# EAGLE board 808_bass_drumv2 (EAGLE 9.0.0)
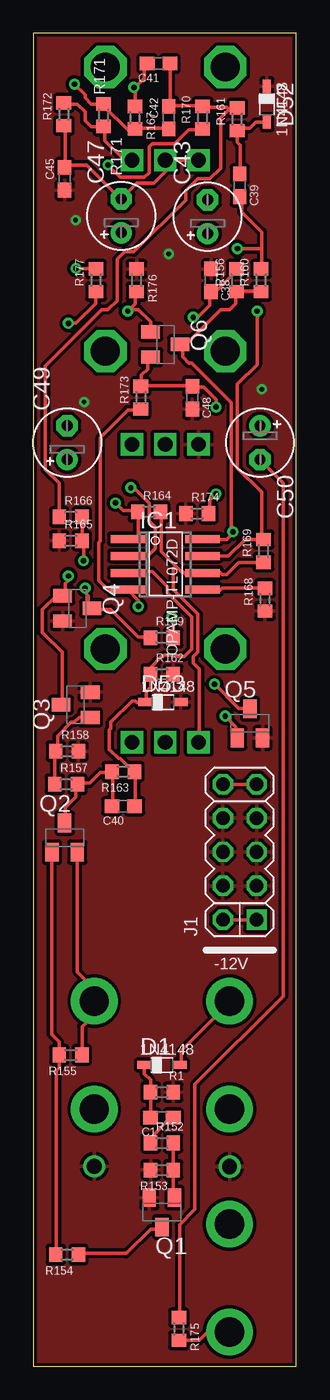
[diagram p0: board, top side]
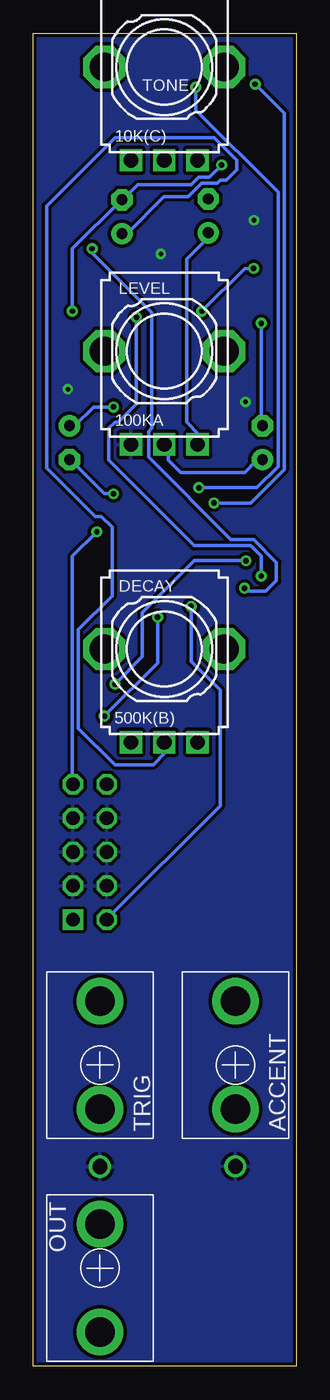
[diagram p1: board, bottom side, seen from below]

Size 19.74 x 100.07 mm. Coordinates in mm from the lower left corner, seen from the top.
Outline: 0,0 19.74,0 19.74,100.07 0,100.07 0,0
Copper layers (1*16): Top 0.035mm / dielectric 1.5mm / Bottom 0.035mm
Design rules "default *": minimum track width 10mil, minimum drill 16mil, track to track 7mil, track to pad 1mil, pad to pad 20mil, via to via 20mil, smd to smd 8mil, copper to edge 10mil, drill to drill 12mil, minimum pad ring 10mil, minimum via ring 8mil, stop-mask expansion 4mil, vias tented up to drill 17mil, thermal gap 10mil
Net classes: 0 default: width 0.203 mm, drill 0.406 mm, clearance 0.203 mm; 1 GND: width 0.254 mm, drill 0.406 mm, clearance 0.254 mm; 2 Power: width 0.254 mm, drill 0.406 mm, clearance 0.254 mm; 3 special: width 0.305 mm, drill 0.406 mm, clearance 0.254 mm; 4 15v: width 0.254 mm, drill 1.016 mm, clearance 0.254 mm

## Footprints (pad centres in the part's own frame; a part is rotated, then mirrored left to right if it is on the bottom)
KOBICONN_PJM301DM_JACK = drill 2.2 pad 3.5: P$1 0,4.8; P$2 0,-3.3 | drill 1.1: P$3 0,-7.6
C0603 = smd 1.1 x 1: 1 -0.85,0; 2 0.85,0
E2,5-5 = drill 0.813 pad 1.6: + -1.27,0 | drill 0.813 pad 1.6 octagon: - 1.27,0
SOD323W_INFINEON = smd 1 x 0.6: A 1.35,0; C -1.35,0
9MM_PLS = drill 1.1 pad 1.676 square: 1 -2.5,-7; 2 0,-7; 3 2.5,-7 | drill 2.159 pad 3.175 octagon: M1 4.5,0; M2 -4.5,0
SO08 = smd 0.6 x 2.6: 1 -1.905,-2.8; 2 -0.635,-2.8; 3 0.635,-2.8; 4 1.905,-2.8; 5 1.905,2.8; 6 0.635,2.8; 7 -0.635,2.8; 8 -1.905,2.8
2X05_EUROPWR_OPEN = drill 1.016 square: 1 -5.08,-1.27 | drill 1.016 octagon: 2 -5.08,1.27; 3 -2.54,-1.27; 4 -2.54,1.27; 5 0,-1.27; 6 0,1.27; 7 2.54,-1.27; 8 2.54,1.27; 9 5.08,-1.27; 10 5.08,1.27
SOT23-BEC = smd 1 x 1.4: B -0.95,-1.1; C 0,1.1; E 0.95,-1.1
R0603 = smd 1 x 1.1: 1 -0.85,0; 2 0.85,0

## Placement (x,y rotation side)
ACCENT  THONKICONN_WQP-PJ301M-12_JACK  [KOBICONN_PJM301DM_JACK]  4.57,22.61 0 bottom
C1  0.1  [C0603]  9.65,18.67 0 top
C38  100n  [C0603]  13.34,81.52 90 top
C39  33n  [C0603]  15.49,88.65 90 top
C40  15n  [C0603]  6.75,42.04 0 top
C41  15n  [C0603]  9.4,97.79 0 top
C42  15n  [C0603]  10.16,93.73 270 top
C43  33/6.3  [E2,5-5]  13.08,86.3 90 top
C45  100n  [C0603]  2.35,89.14 270 top
C47  .47/50  [E2,5-5]  6.6,86.36 90 top
C48  220p  [C0603]  11.94,72.71 90 top
C49  .47/50  [E2,5-5]  2.54,69.33 90 top
C50  1/50  [E2,5-5]  17.02,69.33 270 top
D1  1N4148  [SOD323W_INFINEON]  9.65,22.61 0 top
D52  1N4148  [SOD323W_INFINEON]  17.53,94.74 270 top
D53  1N4148  [SOD323W_INFINEON]  9.72,49.85 0 top
DECAY  500K(B)  [9MM_PLS]  9.91,53.85 0 bottom
IC1  OPAMP-TL072D  [SO08]  9.91,60.2 270 top
J1  HEADER-EUROPWR_2X05-OPEN  [2X05_EUROPWR_OPEN]  15.49,38.61 90 top
LEVEL  100KA  [9MM_PLS]  9.91,76.2 0 bottom
OUT  THONKICONN_WQP-PJ301M-12_JACK  [KOBICONN_PJM301DM_JACK]  14.73,7.37 180 bottom
Q1  bc546  [SOT23-BEC]  9.65,11.56 180 top
Q2  bc556  [SOT23-BEC]  2.35,39.69 0 top
Q3  bc546  [SOT23-BEC]  3.17,49.66 90 top
Q4  bc546  [SOT23-BEC]  3.3,56.9 270 top
Q5  bc546  [SOT23-BEC]  16.26,48.26 0 top
Q6  bc546  [SOT23-BEC]  9.91,76.71 270 top
R1  100K  [R0603]  9.65,20.57 180 top
R152  22K  [R0603]  9.65,16.76 180 top
R153  10K  [R0603]  9.65,14.73 0 top
R154  10K  [R0603]  2.54,8.38 0 top
R155  4K7  [R0603]  2.79,23.37 0 top
R156  1M  [R0603]  15.24,81.52 270 top
R157  8K2  [R0603]  2.46,43.69 180 top
R158  2K7  [R0603]  2.54,46.16 180 top
R159  100K  [R0603]  9.64,54.69 180 top
R160  22K  [R0603]  17.08,81.52 270 top
R161  1M  [R0603]  15.3,93.6 270 top
R162  4K7  [R0603]  9.64,51.94 180 top
R163  100K  [R0603]  6.75,44.64 0 top
R164  47K  [R0603]  8.69,64.14 180 top
R165  47K  [R0603]  2.79,61.98 180 top
R166  6K8  [R0603]  2.79,63.75 180 top
R167  1M  [R0603]  7.62,93.73 90 top
R168  22K  [R0603]  17.38,57.55 270 top
R169  47K  [R0603]  17.27,61.21 270 top
R170  470K  [R0603]  12.7,93.73 270 top
R171  220R  [R0603]  5.27,93.92 270 top
R172  10K  [R0603]  2.29,93.98 270 top
R173  6K8  [R0603]  8.06,72.71 270 top
R174  100K  [R0603]  12.3,64.01 180 top
R175  1K  [R0603]  10.92,2.79 90 top
R176  100K  [R0603]  7.75,81.52 90 top
R177  82K  [R0603]  4.7,81.52 270 top
TONE  10K(C)  [9MM_PLS]  9.91,97.54 0 bottom
TRIG  THONKICONN_WQP-PJ301M-12_JACK  [KOBICONN_PJM301DM_JACK]  14.73,22.61 0 bottom

## Library data of the parts
ACCENT C1 C38-C43 C45 C47-C50 D1 D52 D53 DECAY IC1 J1 LEVEL OUT Q1-Q6 R1 R152-R177 TONE TRIG = 0000-master

## Nets
+12V: IC1.8 J1.9 J1.10 Q6.C R156.2 R160.2
-12V: IC1.4 J1.1 J1.2 R173.2
C49: C49.- R177.2
GND [GND]: ACCENT.P$3 C38.2 C45.2 C48.1 D52.C D53.A J1.3 J1.4 J1.5 J1.6 J1.7 J1.8 LEVEL.1 OUT.P$3 Q1.E Q3.E Q4.E Q5.E R1.1 R153.1 R158.1 R162.1 R165.2 R168.2 R174.2 R176.2 TRIG.P$3
N$1: DECAY.1 IC1.6 R164.1 R169.2
N$2: IC1.5 R168.1
N$3: OUT.P$1 R175.1
N$4: D1.A TRIG.P$1
N$5: C1.1 D1.C R1.2
N$6: C1.2 R152.2
N$162: C38.1 Q3.C Q4.B R156.1
N$164: Q2.B R154.1 R155.1
N$168: Q5.C R165.1 R166.1
N$169: Q3.B R157.2 R158.2
N$188: Q1.C R154.2
N$190: C39.1 Q4.C R159.2 R160.1
N$191: C40.1 Q2.C R157.1 R163.1
N$192: C40.2 D53.C IC1.3 R162.2 R163.2
N$193: Q5.B R159.1
N$195: C41.2 C42.1 R161.1 R166.2 R170.1
N$196: C41.1 IC1.2 R167.2
N$197: C42.2 IC1.1 R164.2 R167.1 R171.1
N$198: C45.1 C47.- R172.2 TONE.1 TONE.2
N$199: R171.2 R172.1 TONE.3
N$202: C43.- IC1.7 R169.1 R170.2
N$203: Q6.B R176.1 R177.1
N$204: C48.2 C50.+ Q6.E R173.1
N$205: C50.- R174.1 R175.2
N$206: C47.+ LEVEL.3
N$207: C49.+ LEVEL.2
N$208: C43.+ DECAY.2
N$217: Q1.B R152.1 R153.2
N$242: C39.2 D52.A R161.2
TRIG: ACCENT.P$1 Q2.E R155.2

## Tracks (layer width: path | path; a pad name or v marks a point on that pad's centre or on a via)
+12V  (via drill 0.41)
  Top 0.254: J1.10 14.29,43.66 16.69,43.66 J1.9 | R160.2 17.03,80.7 15.32,80.7 R156.2 15.2,80.58 15.2,79.78 14.74,79.32 14.06,79.32 11.54,76.81 11.09,76.81 Q6.C 11.2,76.69 11.2,75.78 11.66,75.32 11.89,75.32 14.86,72.35 14.86,62.64 | 14.86,62.64 14.86,62.41 14.52,62.06 12.8,62.06 IC1.8 | v14.97,62.64 14.86,62.64
  Bottom 0.254: v14.97,62.64 16.8,60.81 16.8,43.78 J1.9
-12V  (via drill 0.41)
  Top 0.254: J1.2 14.29,33.49 16.69,33.49 J1.1 | 7.09,58.29 6.97,58.18 5.83,58.18 5.6,58.41 5.49,58.41 4.92,58.98 4.92,61.84 5.03,61.95 5.03,69.72 7.09,71.78 8,71.78 R173.2 | v7.89,57.04 7.89,57.49 7.09,58.29 | 7.09,58.29 IC1.4
  Bottom 0.254: v7.89,57.04 7.89,52.92 5.71,50.75 5.71,42.06 14.17,33.6 J1.2
C49  (via drill 0.41)
  Top 0.254: v2.63,78.3 3.2,78.3 4.69,79.78 4.69,80.58 R177.2
  Bottom 0.254: v2.63,78.3 2.63,70.64 C49.-
GND  (via drill 0.35)
  other vias: 3.17,86.04 10.16,83.5 17.14,73.34 3.81,72.39
  pour Top: 0,0 0,100.33 19.68,100.33 19.68,0
  pour Bottom: 0,0 0,100.33 19.68,100.33 19.68,0
N$1
  Top 0.254: 10.69,60.06 11.09,59.66 11.2,59.66 11.43,59.44 12.57,59.44 12.69,59.55 IC1.6 12.8,59.66 13.95,59.66 14.17,59.44 14.52,59.44 15.43,60.35 R169.2 | 10.69,60.06 9.6,61.15 9.6,64.12 R164.1 | 10.69,60.06 10.52,59.89 10.52,58.29 12.34,56.46 12.34,53.61 12,53.26 12,52.81 12.46,52.35 12.46,46.86 DECAY.1
N$2
  Top 0.254: R168.1 14.17,58.41 13.95,58.18 12.92,58.18 12.8,58.29 IC1.5
N$3
  Top 0.254: R175.1 10.97,1.94 12.46,1.94 13.03,2.52 14.63,2.52 OUT.P$1
N$4
  Top 0.254: D1.A 11.09,22.63 11.09,23.66 14.74,27.32 TRIG.P$1
N$5
  Top 0.254: D1.C 8.34,22.52 8.34,21.95 8.8,21.49 R1.2 8.8,20.46 8.8,18.75 C1.1
N$6
  Top 0.254: R152.2 8.91,16.8 8.91,17.26 10.4,18.75 C1.2
N$162  (via drill 0.41)
  Top 0.254: R156.1 15.32,82.3 13.72,80.7 13.37,80.7 C38.1 13.26,80.58 13.26,79.67 12.34,78.75 v12,78.75 | Q3.C 2.17,49.72 2.17,53.61 0.69,55.09 0.69,56.81 1.71,57.84 2.17,57.84 Q4.B 2.29,57.95 2.4,58.06 2.4,58.75 2.63,58.98 v2.63,59.32
  Bottom 0.254: v12,78.75 12,72.24 13.37,70.87 13.6,70.87 14.06,70.41 14.06,68.01 7.66,61.61 3.43,61.61 2.63,60.81 v2.63,59.32
N$164
  Top 0.254: R154.1 1.71,8.46 1.71,22.17 1.94,22.4 1.94,23.32 R155.1 1.94,23.43 1.94,24.35 1.37,24.92 1.37,38.52 Q2.B
N$168  (via drill 0.41)
  Top 0.254: R166.1 3.66,63.66 3.66,62.06 R165.1 3.77,62.06 v3.77,60.47 | v13.6,51.21 15.43,49.38 16.23,49.38 Q5.C
  Bottom 0.254: v13.6,51.21 11.54,53.26 11.54,56.58 7.66,60.47 v3.77,60.47
N$169
  Top 0.254: R157.2 1.6,43.78 1.6,46.06 R158.2 1.71,46.29 1.83,46.41 1.83,47.32 2.86,48.35 3.09,48.35 3.43,48.69 4.23,48.69 Q3.B
N$188
  Top 0.254: R154.2 3.43,8.46 6.97,8.46 8.8,10.29 9.49,10.29 9.6,10.4 Q1.C
N$190  (via drill 0.41)
  Top 0.254: 17.14,83.9 17.14,85.15 15.66,86.64 15.66,87.67 15.54,87.78 C39.1 | 17.14,83.9 17.14,82.41 R160.1 | R159.2 8.69,54.75 7.89,54.75 5.83,56.81 4.46,56.81 Q4.C 4.34,56.92 4.12,57.15 4.12,57.84 3.89,58.06 v3.89,58.41 | v15.32,83.9 17.14,83.9
  Bottom 0.254: v15.32,83.9 15.32,83.55 10.86,79.1 10.86,70.41 11.09,70.18 11.09,68.24 4.92,62.06 3.2,62.06 1.49,60.35 1.49,58.98 2.29,58.18 3.66,58.18 v3.89,58.41
N$191
  Top 0.254: C40.1 5.94,42.06 5.94,44.58 R163.1 5.83,44.58 5.03,44.58 4.23,43.78 3.31,43.78 R157.1 3.2,43.66 3.2,42.75 2.4,41.95 2.4,40.8 Q2.C
N$192
  Top 0.254: C40.2 7.66,42.06 7.66,44.58 R163.2 7.54,44.58 6.51,45.61 6.4,45.61 5.71,46.29 5.71,47.78 5.83,47.89 5.83,48.35 7.43,49.95 7.66,49.95 7.77,49.84 8.34,49.84 D53.C 8.46,49.95 8.46,50.63 8.8,50.98 8.8,51.89 R162.2 8.8,52.01 8.8,52.46 9.6,53.26 9.72,53.26 9.83,53.38 10.74,53.38 10.86,53.26 11.32,53.26 11.89,53.84 11.89,56.24 10.06,58.06 10.06,58.52 8.91,59.66 8.57,59.66 8.46,59.55 7.2,59.55 IC1.3
N$193  (via drill 0.41)
  Top 0.254: v10.4,56.24 10.52,56.12 10.52,54.75 R159.1 | v14.4,48.81 15.2,48.01 15.2,47.21 Q5.B
  Bottom 0.254: v10.4,56.24 10.4,52.81 v14.4,48.81
N$195
  Top 0.254: C41.2 10.29,97.73 10.29,94.75 C42.1 10.17,94.64 12.69,94.64 R170.1 12.8,94.53 14.52,94.53 14.69,94.36 | 14.69,94.36 14.86,94.53 15.2,94.53 R161.1 | 14.69,94.36 13.95,93.61 14.06,93.5 14.06,89.95 13.26,89.15 12.34,89.15 11.43,88.24 11.43,87.55 7.54,83.67 6.86,83.67 6.29,83.1 6.29,80.01 5.6,79.32 5.14,79.32 0.91,75.09 0.91,67.32 1.94,66.29 1.94,63.78 R166.2
N$196  (via drill 0.41)
  Top 0.254: 7.66,96.01 7.66,94.64 R167.2 | 7.66,96.01 8.34,96.7 8.34,97.61 8.46,97.73 C41.1 | v7.32,65.95 7.54,65.95 8.69,64.81 8.69,63.44 9.14,62.98 9.14,61.38 8.57,60.81 7.2,60.81 IC1.2 | v7.54,96.01 7.66,96.01
  Bottom 0.254: v7.54,96.01 7.54,94.3 1.37,88.12 1.37,67.55 2.97,65.95 v7.32,65.95
N$197  (via drill 0.41)
  Top 0.254: IC1.1 7.2,62.18 7.77,62.18 7.89,62.29 7.89,64.12 R164.2 7.77,64.24 6.74,64.24 v6.17,64.81 | C42.2 10.06,92.93 7.66,92.93 R167.1 7.54,92.81 7.09,92.81 5.37,94.53 5.37,94.75 R171.1 5.14,94.75 4.34,94.75 3.89,95.21 3.89,95.44 v3.09,96.24
  Bottom 0.254: v6.17,64.81 3.43,64.81 0.91,67.32 0.91,94.07 v3.09,96.24
N$198
  Top 0.254: TONE.1 12.34,90.53 9.94,90.53 TONE.2 9.94,90.41 9.94,89.72 9.03,88.81 7.77,88.81 6.63,87.67 C47.- 6.51,87.67 4,90.18 2.52,90.18 C45.1 2.4,90.07 2.4,92.93 2.29,93.04 R172.2
N$199
  Top 0.254: TONE.3 7.32,90.64 6.74,90.64 5.37,92.01 5.37,93.04 R171.2 5.14,93.04 4.34,93.04 3.89,93.5 3.89,94.18 3.31,94.75 2.29,94.75 R172.1
N$202  (via drill 0.41)
  Top 0.254: IC1.7 12.8,60.81 14.63,60.81 15.89,62.06 R169.1 17.14,62.18 17.14,65.61 15.32,67.44 15.32,73.72 16.8,75.21 v16.8,79.21 | v5.6,90.18 6.51,89.27 8.34,89.27 8.69,89.61 8.69,91.55 8.91,91.78 10.63,91.78 11.66,92.81 12.69,92.81 R170.2
  Bottom 0.254: v5.6,90.18 6.51,89.27 7.32,89.27 7.89,88.7 11.89,88.7 13.03,87.55 C43.- 13.14,87.55 16.8,83.9 v16.8,79.21
N$203  (via drill 0.41)
  Top 0.254: v3.2,82.41 4.69,82.41 R177.1 | R176.1 7.66,80.58 7.66,79.78 v7.09,79.21 7.43,79.44 7.54,79.32 7.89,79.32 8.8,78.41 8.8,77.72 Q6.B
  Bottom 0.254: v3.2,82.41 3.89,82.41 v7.09,79.21
N$204  (via drill 0.41)
  Top 0.254: Q6.E 8.8,75.67 8.57,75.44 8.57,74.87 8.12,74.41 8.12,73.61 R173.1 8.23,73.61 11.89,73.61 C48.2 12,73.5 12.8,73.5 13.72,72.58 v13.72,72.01
  Bottom 0.254: v13.72,72.01 15.2,72.01 16.57,70.64 16.92,70.64 C50.+
N$205  (via drill 0.41)
  Top 0.254: R175.2 10.97,3.66 10.97,10.63 12.12,11.77 12.12,21.14 18.75,27.77 18.75,66.29 17.03,68.01 C50.- | v13.72,65.49 13.26,65.04 13.26,64.01 R174.1
  Bottom 0.254: v13.72,65.49 14.4,65.49 16.92,68.01 C50.-
N$206
  Bottom 0.254: C47.+ 6.63,85.04 6.63,84.7 8.23,83.1 8.23,70.87 7.32,69.95 7.32,69.27 LEVEL.3
N$207
  Bottom 0.254: C49.+ 2.63,68.01 2.97,68.01 3.89,67.09 8.69,67.09 9.6,68.01 9.6,68.92 9.83,69.15 LEVEL.2
N$208
  Bottom 0.254: C43.+ 13.03,85.04 12.69,85.04 9.94,87.78 8.12,87.78 7.09,88.81 5.94,88.81 5.71,89.04 5.26,89.04 4.46,89.84 4.46,90.53 6.17,92.24 13.6,92.24 18.75,87.1 18.75,67.44 15.09,63.78 14.63,63.78 13.83,62.98 13.83,57.84 16.34,55.32 16.34,47.89 13.6,45.15 10.74,45.15 9.83,46.06 9.83,46.75 DECAY.2
N$217
  Top 0.254: Q1.B 10.52,12.69 10.52,14.63 R153.2 10.52,14.86 10.52,16.69 R152.1
N$242
  Top 0.254: D52.A 17.49,93.38 16.69,93.38 16.23,92.93 15.43,92.93 15.32,92.81 R161.2 15.32,92.7 15.32,91.9 15.54,91.67 15.54,89.5 C39.2
TRIG
  Top 0.254: R155.2 3.66,23.43 3.66,25.49 4.57,26.4 ACCENT.P$1 4.46,27.43 4.46,28.46 3.31,29.6 3.31,38.52 Q2.E